# Altium PCB kernel.PcbDoc (part 5 of 7)
Units mil, origin at the board's own origin, x right, y up, seen from the top; angles counter-clockwise.
Board outline 2360 x 2450.34 mil, 6 copper layers (Top Layer, GND, SIGNAL, POWER, GND1, Bottom Layer), stack 32.112 mil thick; 150 components, 174 nets, 684 pads, 710 vias.
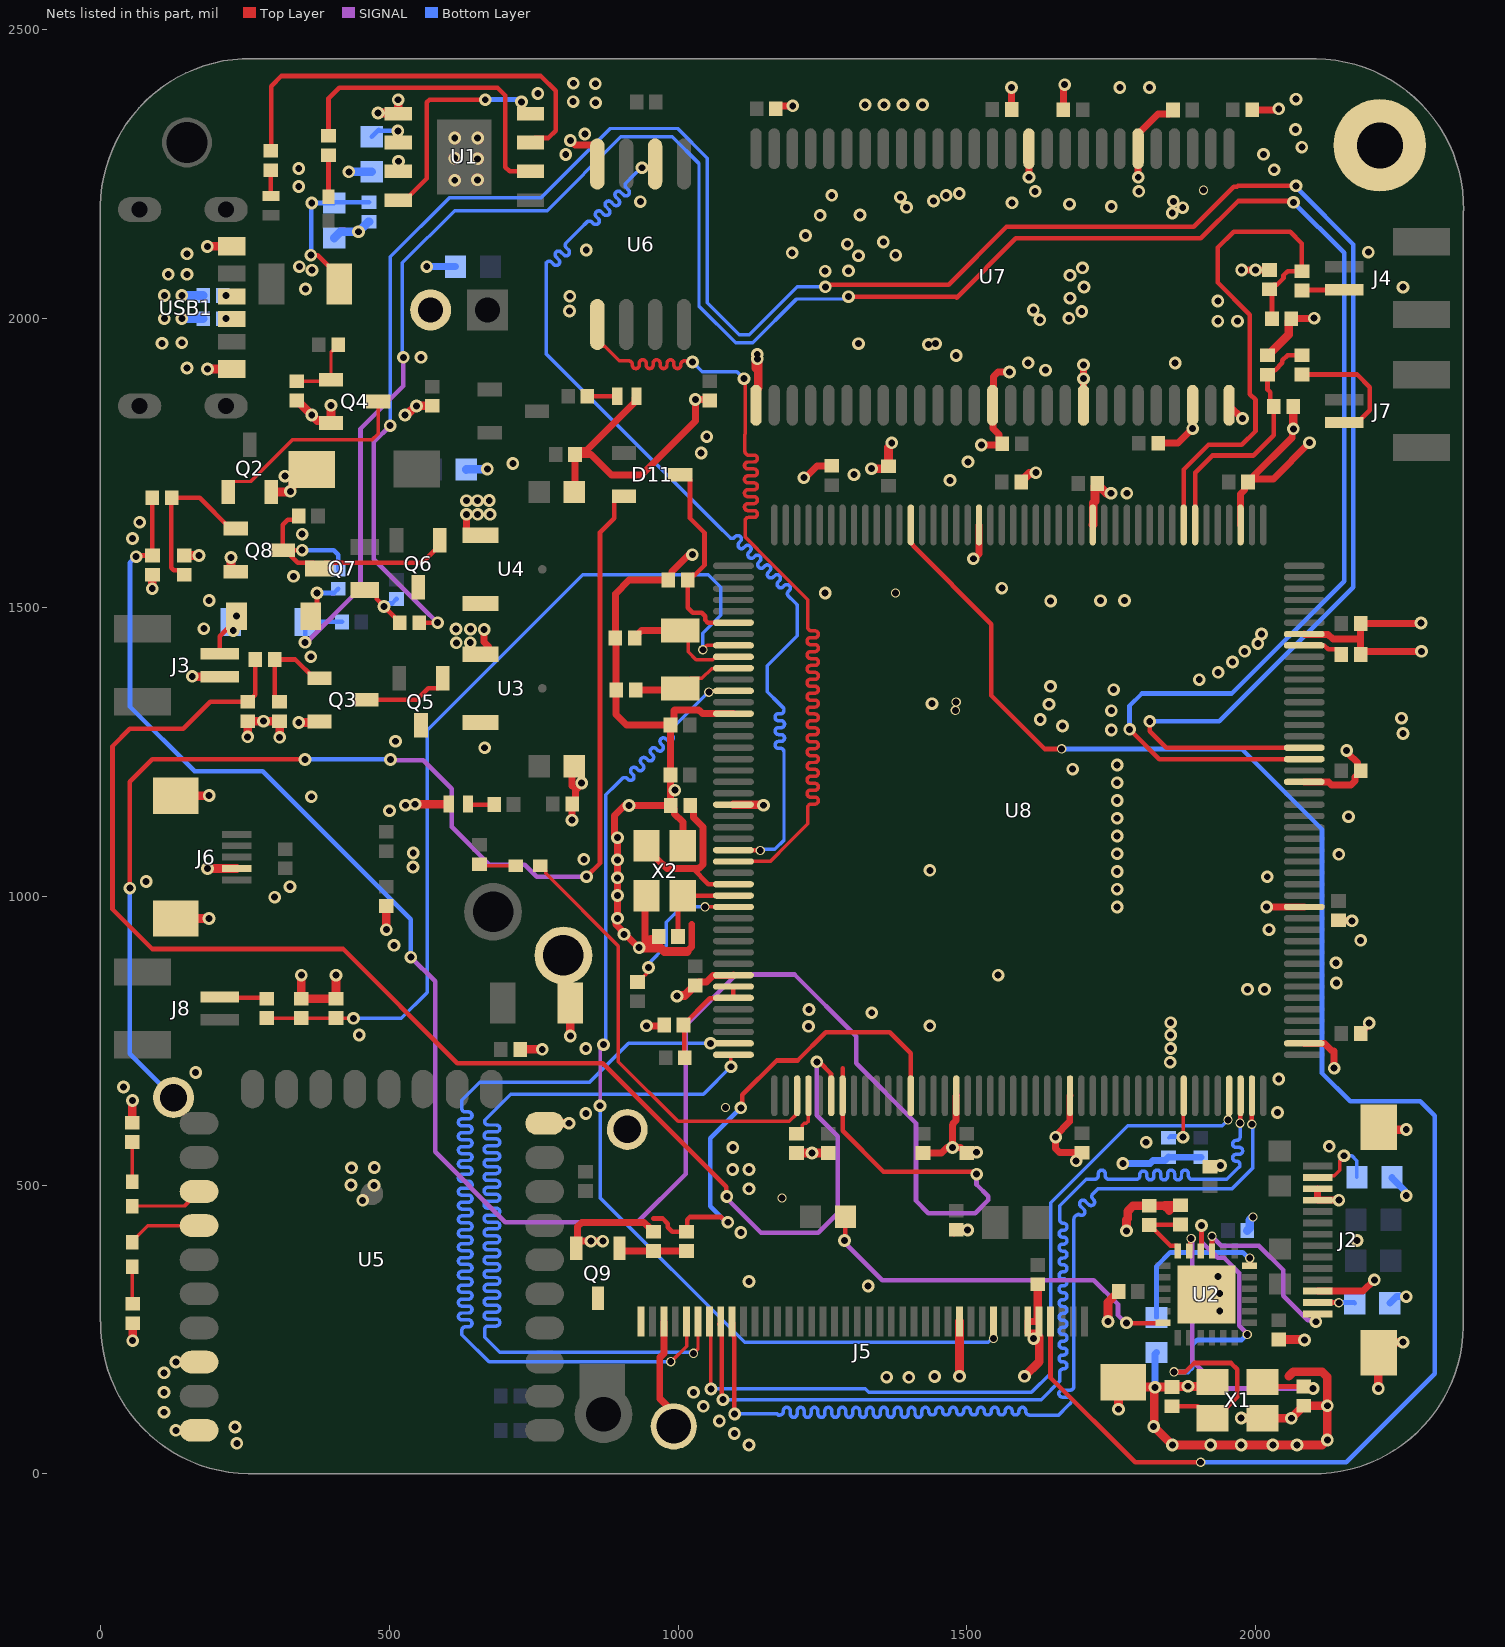
[diagram p8: the nets of this part, all layers, seen from the top]

## Via types
v1: diameter 22, hole 12, Top Layer to Bottom Layer, tented both sides, 583 vias
v2: diameter 16, hole 12, Top Layer to Bottom Layer, tented both sides, 111 vias
v3: diameter 23.62, hole 15.75, Top Layer to Bottom Layer, 8 vias
v4: diameter 28, hole 14, Top Layer to Bottom Layer, 5 vias
v5: diameter 22, hole 12, Top Layer to Bottom Layer, 3 vias

## Nets (pads, with @x,y where several pads share a name; then routed paths per layer and width w, separated by ;. In a path a pad name is that pad's centre, name@x,y a point inside that pad or via, vN(x,y) a via of type N, cw(c..) or ccw(c..) an arc to the next point about the centre after c; other vN are vias at no path point) (continued)
GND: B1.1 C1.1 C2.1 C4.2 C5.2 C6.1 C7.2 C8.1 C9.2 C10.2 C11.2 C12.1 C13.1 C14.1 C15.1 C16.1 C17.2 C18.2 C19.2 C20.1 C21.1 C22.1 C23.1 C24.1 C25.2 C26.2 C27.1 C28.1 C29.2 C30.1 C31.1 C32.1 C33.1 C34.1 C35.1 C36.1 C37.1 C38.1 C39.1 C40.1 C41.1 C42.1 C43.1 C44.1 C45.2 C46.1 C47.1 C48.1 C49.1 C50.1 C51.1 C52.1 C53.1 C54.2 D1.1 D2.1 J1.2 J2.3 J2.11 J2.12 J2.15 J2.16 J3.2 J5.3 J5.29 J5.35 J5.36 J5.42 J6.4 J6.6 J6.7 pad.3 pad.4 Q3.2 Q4.2 Q8.2 Q9.2 R1.2 R4.1 R10.1 R11.2 R12.2 R13.1 R19.2 R20.1 R21.1 R22.1 R32.1 R33.1 R34.1 R35.2 R37.2 R39.2 R41.2 R46.2 R48.2 R50.2 R51.2 R53.1 R54.2 U1.1 U1.3 U2.25 U3.1 U4.1 U5.10 U5.26 U5.28 U6.4 U7.6 U7.12 U7.28 U7.41 U7.46 U7.52 U7.54 U8.14 U8.22 U8.37 U8.61 U8.71 U8.90 U8.102 U8.113 U8.126 U8.135 U8.148 U8.158 USB1.A12 USB1.B12 X1.2 X1.4 X2.2 X2.4 | length 9541.5
  Top Layer w10: C36.1@1500,555.63 1501.23,556.86 v1(1516.78,556.86) 1517.08,556.86 v1@1518.32,555.63 ; v1@1690.85,536.89 1691.66,537.7 1691.66,549.38 C33.1@1698.47,556.2
  Top Layer w12: v1(633.96,1661.3) 633.96,1634.74 643.76,1624.95 U4.1@658.21,1624.95 ; U3.1@658.21,1419.05 671.76,1432.6 664.39,1439.98 v1(664.39,1461.74) ; v1(813.66,2308.47) 821.72,2300.4 854.38,2300.4 860.3,2294.49 U6.4@860.3,2267.76 ; v1(816.33,1131.77) 816.53,1131.97 816.53,1159.8 822.54,1165.81 822.54,1182.86 833.18,1193.5 v1(833.18,1196.2) ; 816.73,1190.71 816.73,1221.42 C7.2@820.32,1225 ; C10.2@820.32,1700 821.73,1701.42 C11.2@821.73,1765 848.97,1765 885,1728.97 936.52,1728.97 1030,1822.46 v1(1030,1860) 1052.18,1860 1054.46,1857.72 C17.2@1055,1858.27 ; Q9.2@823.82,390.88 823.82,398.62 Q9.2@826.34,401.13 ; C11.2@827.54,1771.63 841.17,1771.63 925.25,1855.71 925.25,1862.84 D2.1@928.11,1865.7 ; v1(869.76,403.01) 828.38,403.01 828.29,403.09 Q9.2@826.34,401.13 ; v1@889.73,1101.42 889.73,1139.73 907.31,1157.31 v1(915.13,1157.31) C25.2@987.6,1157.31 ; v1@889.96,1032.61 890.63,1033.28 891.84,1033.28 895.12,1036.56 v1(895.12,1063.1) ; v1@890.63,1002.56 891.84,1002.56 895.12,1005.84 v1(895.12,1031.94) ; v1@890.63,1064 891.4,1064 895.12,1067.72 v1(895.12,1101.42) ; v1@892.54,959.94 892.54,950.88 906.55,936.87 v1(906.55,934.17) 908.72,934.17 927.89,915 927.89,913.27 v1@930.57,910.59 ; v1(895.12,961.85) v1(895.12,1001.22) ; v1@942.8,914.78 942.8,998.42 X2.2@945.29,1000.91 ; v1(945.29,775.72) 974.73,775.72 C53.1@975.97,776.97 ; R41.2@957.3,419.42 956.32,419.42 950.51,425.23 950.51,426.22 941.45,435.27 833.37,435.27 826.34,428.24 Q9.2@826.34,401.13 ; J5.3@975.52,263.94 975.52,208.78 968.39,201.66 968.39,130.4 992.7,106.09 pad.3@992.7,82.27 ; v1(994.5,1183.69) v1@987.24,1183.69 ; X2.4@1008.29,1087.53 1008.29,1128.51 993.41,1143.39 993.41,1151.5 C25.2@987.6,1157.31 ; 1015.49,904.3 1015.49,904.51 1023.81,912.83 1023.81,950.95 ; v1(1024.79,1591.39) 1019.19,1591.39 989.08,1561.29 989.08,1553.17 C29.2@983.27,1547.36 915.2,1547.36 891.54,1523.7 C27.1@891.54,1447.36 892.4,1446.5 892.4,1315.03 910.92,1296.5 C31.1@986.89,1296.5 ; C30.1@1030,845.63 1035.81,851.44 1048.92,851.44 1060.43,862.95 1095.42,862.95 U8.37@1095.91,863.43 ; U8.14@1095.91,1316.18 1042.25,1316.18 1035.84,1322.6 993.92,1322.6 992.7,1321.38 992.7,1302.31 C31.1@986.89,1296.5 ; C48.1@1169.48,2363.2 1175,2368.72 1175.22,2368.49 v1(1198.59,2368.49) ; v1(1217.8,1724.77) 1220.6,1724.77 1240.9,1745.07 C39.1@1266.09,1745.07 ; R51.2@1423.89,555.63 1456.17,555.63 1465.54,565 v1(1475,565) ; U8.61@1481.73,654.77 1481.24,654.28 1481.24,611.91 1476.1,606.78 1476.1,604.98 1475,603.87 v1(1475,565) ; C36.1@1500,555.63 1499.02,555.63 1489.36,565.28 1482.23,565.28 1480.19,567.33 1477.86,565 v1(1475,565) ; v1@1512.95,1584.34 1521.1,1592.49 U8.158@1521.1,1642.95 ; v1(1525.16,1781.14) 1559.11,1781.14 C51.1@1561.42,1783.46 1555.61,1789.27 1555.61,1799.65 1545.34,1809.92 1545.34,1849.11 U7.41@1544.45,1850 1545.92,1851.47 1545.92,1899.47 1554.14,1907.68 v1(1574,1907.68) ; C46.1@1577.43,2361.87 v1(1577.43,2400) ; v1(1607.44,2244.76) U7.12@1607.44,2294.26 ; J5.36@1622.7,263.94 J5.35@1605.43,263.94 1605.43,244.45 1605.53,244.35 1618.43,244.35 v1@1625.11,237.67 ; C50.1@1667.04,2361.73 1667.04,2396.59 1667.45,2397 1667.45,2403.09 v1(1669.37,2405) ; U8.71@1678.58,654.77 1678.09,654.28 1678.09,609.87 1653.3,585.08 1653.3,563.23 1660.33,556.2 C33.1@1698.47,556.2 ; U7.46@1701.93,1850 v1(1701.93,1920) ; v1(1796.69,2244.76) 1796.42,2245.03 U7.6@1796.42,2294.26 1796.42,2319.85 1831.01,2354.44 1850.97,2354.44 1856.78,2360.25 C49.1@1856.78,2361.24 ; C52.1@1831.3,1784.42 1865.76,1784.42 v1(1890.91,1809.57) U7.52@1890.91,1850 ; C15.1@1921.02,531.86 1922.16,532.99 1937.82,532.99 v1(1938.95,534.12) ; U7.54@1953.9,1850 1976.75,1827.15 v1(1977.25,1827.15) ; U8.135@1973.86,1642.95 1973.86,1696.38 1980.92,1703.44 1980.92,1711.55 C43.1@1986.73,1717.36 1986.73,1718.35 1992.54,1724.16 1992.93,1724.16 2063.31,1794.54 2063.31,1807.79 v1@2065.03,1809.52 ; v1(1975.73,2084.11) C22.1@2023.85,2084.11 ; C43.1@1991.87,1722.5 2030.55,1722.5 v1(2093.3,1785.25) ; C47.1@1993.85,2361.54 2038.34,2361.54 v1(2040,2363.2) ; v1(2019.09,981.54) U8.102@2084.09,981.54 ; R39.2@2061.73,2000 2100.31,2000 v1(2101.2,2000.89) ; U8.90@2084.09,745.32 2119.09,745.32 2131.52,732.89 ; U8.113@2084.09,1198.07 2084.58,1197.59 2126.47,1197.59 2131.49,1192.57 2165.05,1192.57 2172.08,1199.6 2172.08,1206.72 2181.73,1216.38 C41.1@2181.73,1217.36 2175.92,1223.17 2175.92,1231.29 v1@2160.6,1246.6 ; U8.126@2084.09,1453.98 2084.58,1453.49 2125.56,1453.49 2133.59,1445.46 2181.73,1445.46 ; J2.3@2107.24,316.42 2185.75,316.42 v1(2205.43,336.1) ; J2.12@2107.24,493.58 J2.11@2107.24,473.9 v1(2143.96,473.9) ; v1(2135.9,702.52) 2135.9,731.94 ; C38.1@2143.18,958.27 2166.16,958.27 v1(2166.86,957.56) ; v1(2157.52,1252.41) 2157.52,1249.71 v1@2160.6,1246.63 ; C37.1@2181.73,762.36 2181.73,763.35 2194.48,776.09 2194.48,781.16 2196.03,781.16 v1(2196.39,780.79) ; v1(2286.93,1424.02) 2187.2,1424.02 C54.2@2181.73,1418.56 2181.73,1445.46 ; v1@2286.93,1473.66 2285.63,1472.36 C44.1@2181.73,1472.36 2181.73,1445.46 ; C31.1@986.89,1296.5 C35.1@986.89,1210.08 987.24,1209.72 v1@987.24,1183.69 ; v1@987.24,1183.69 987.24,1157.66 C25.2@987.6,1157.31
  Top Layer w15: R37.2@55.17,608.03 55.17,646 v1(55.71,646.54) ; v1(55.84,230.66) R35.2@55.84,260.92 ; v1(89.76,1532.53) 89.76,1555.91 R33.1@90.33,1556.48 ; v1(130.63,75.55) U5.28@170.79,75.55 ; v1(130.63,193.66) U5.26@170.79,193.66 ; J6.6@130.63,961.55 v1(187.94,961.55) v1@188.25,961.85 ; J6.7@130.63,1174.15 187.81,1174.15 v1(188.25,1174.58) ; R34.1@145.33,1589.94 145.47,1590.08 v1(170.79,1590.08) ; v1(159.02,1380.69) 159.76,1379.95 206.56,1379.95 J3.2@206.93,1380.32 ; v1@185.36,1048.27 v1(185.47,1048.16) J6.4@236.14,1048.16 ; v1(185.36,1912.71) USB1.A12@227.44,1912.71 ; v1@188.86,2125 v1(185.06,2125) 185.36,2125.3 USB1.B12@227.44,2125.3 ; v1(226.17,1586.59) 226.17,1566.18 230.49,1561.86 Q8.2@234.25,1561.86 ; v1(255,1276) R11.2@255,1303.27 v1(282.5,1303.27) R12.2@310,1303.27 310.32,1302.95 v1(310.32,1275.14) ; R20.1@340,1858.27 340.98,1858.27 v1(365.92,1833.33) 375.66,1823.59 394.94,1823.59 Q4.2@399.25,1819.28 v1(399.25,1850) ; v1(343.35,1300.94) 377.59,1300.94 Q3.2@379.25,1302.6 ; v1(347.9,863.43) C24.1@347.9,822.72 R48.2@407.9,822.72 v1(407.9,863.43) ; v1(480.75,2356.05) 514.34,2356.05 U1.1@515.5,2354.88 v1(515.5,2379) ; v1(495,942.17) R53.1@495,983.27 ; U1.3@515.5,2254.88 515.97,2255.35 v1(515.97,2272.54) ; v1(527.31,1833.33) 528.65,1834.67 531.18,1834.67 545.44,1848.93 v1(547.33,1848.93) R1.2@574.37,1848.93 ; v1(544.94,1159.38) 602.45,1159.38 D1.1@603.07,1160 ; C20.1@726.73,735 v1(764.99,735) ; U5.10@769.21,607.05 v1(811.38,607.05) v1@812.36,608.03 ; v1(813.66,757.99) C21.1@813.66,815 ; C26.2@966.54,930.59 966.54,929.61 962.22,925.3 953.31,925.3 942.8,914.78 939.95,911.93 931.91,911.93 930.57,910.59 969.88,910.59 976.18,904.3 1015.49,904.3 ; v1(998.25,827.05) 999.59,828.39 1011.77,828.39 1024.7,841.32 1025.69,841.32 C30.1@1030,845.63 ; U8.22@1095.91,1158.7 1146.75,1158.7 v1(1147.88,1157.57) ; U7.28@1135,1850 1135,1876.86 1138.71,1880.57 1138.71,1928.9 v1(1137.26,1930.36) ; 1135,1914.52 1135,1936.27 v1(1137.1,1938.36) ; R54.2@1210.3,551.32 1205.98,555.63 R54.2@1205,555.63 C34.1@1259.02,555.63 ; C34.1@1254.7,551.32 C34.1@1259.02,555.63 ; C34.1@1260,555.63 C34.1@1259.02,555.63 ; v1(1334.82,1740.39) 1335.34,1739.87 1359.96,1739.87 R50.2@1364.27,1744.18 1364.27,1777.46 1370,1783.19 v1(1370,1785.09) ; C1.1@1477.42,418.11 C1.1@1481.73,422.42 v1(1501.42,422.42) ; v1(1487.32,169) J5.29@1487.32,263.94 ; C40.1@1594.16,1717.36 1594.16,1718.35 1607.93,1732.12 1618.19,1732.12 v1(1619.53,1733.46) ; v1(1599.84,169) 1625.11,194.28 v1@1625.11,237.67 ; J5.36@1622.7,263.94 C2.1@1622.7,328.12 ; U8.148@1717.95,1642.95 1718.63,1643.63 1718.63,1680.75 1721.74,1683.86 1721.74,1710.09 C42.1@1726.05,1714.4 1726.05,1713.42 1742.8,1696.66 1748.32,1696.66 v1(1749.38,1697.72) ; v1(1744.29,263.86) 1744.29,297.3 C14.1@1762.67,315.68 ; v1(1762.67,111.96) 1762.67,133.17 1754.09,141.74 J5.42@1770.78,158.43 1778.72,150.5 C18.2@1855.17,150.5 1856.11,151.44 1917.53,151.44 X1.4@1925.5,159.41 ; v1(1776.36,420.76) 1776.36,439.48 1778.46,441.58 1778.46,454.87 1787.76,464.17 1810.46,464.17 1810.63,464.34 C12.1@1815.75,464.34 1815.92,464.17 1842.65,464.17 1850.64,456.18 1851.49,457.02 ; v1(1823.48,82.27) 1824.54,83.34 1824.54,148.78 v1(1825.6,149.85) ; v1@1825.6,80.15 v1(1855.75,50) v1(1922.16,50) v1(1974.91,50) v1(2029.65,50) v1(2071.46,50) 2115.27,50 v1(2124.06,58.79) v1(2124.06,117.98) ; 1842.81,464.76 1869.45,464.76 C13.1@1869.87,465.18 ; v1(1974.8,96.82) 2011.72,96.82 X1.2@2012.12,96.42 v1(2061.83,96.42) 2078.09,112.68 2078.09,113.67 2082.4,117.98 C19.2@2083.38,117.98 v1(2124.06,117.98) ; C23.1@2020.48,1936.46 2021.46,1936.46 2057.42,1972.42 2057.42,1995.69 R39.2@2061.73,2000 ; C16.1@2040.08,232.67 2078.21,232.67 2079.11,231.77 v1(2084.57,231.77) ; 2057.15,169 2064.9,176.75 2115.01,176.75 2124.06,167.71 v1(2124.06,117.98) ; R46.2@2064.85,1847.78 2065.03,1847.6 v1@2065.03,1809.52 ; v1(2212.34,148) 2212.34,209.78 2230.76,228.2 v1(2255,228.2) ; J2.15@2212.76,599.8 2216.45,596.11 v1(2260.68,596.11)
  Bottom Layer w12: v1(565,2090) C6.1@614.68,2090 ; v1@1771.97,537.37 1817.45,537.37 1822.57,542.48 1843.37,542.48 C45.2@1849.18,548.29 C32.1@1905,548.27 ; v1(1825.6,149.85) 1825.6,207.51 R21.1@1828.29,210.2 ; R22.1@2232.24,295.57 2243.66,306.99 v1(2260.68,306.99) ; R32.1@2235.95,513.47 2235.95,512.49 2258.77,489.66 2258.77,483.67 v1(2260.68,481.76)
  Bottom Layer w15: v1(140.98,2000) R13.1@178.27,2000 ; v1(140.98,2040) R10.1@178.27,2040 ; C4.2@405,2139.69 415.81,2150.49 v1(446.67,2150.49) 464.02,2167.83 C5.2@465,2167.83 ; v1@430,2254.1 v1(430.15,2254.25) R4.1@470,2254.25 ; C8.1@633.38,1738.97 633.75,1739.34 669.53,1739.34 v1(669.9,1739.71) ; R19.2@1985.54,421.25 1989.85,425.56 1989.85,439.45 v2@1995,444.6
  other v1: 1122.95,50 236.14,53.06 1097.4,70 232.89,81.23 1071.6,91.76 110,106.83 1043.83,117.04 110,141.28 1026.81,141.28 1882.97,151.82 1399.61,167.28 1361.13,167.58 1444.28,168.54 110,175 1615.72,234.22 1937.82,282.39 1937.82,312 1329.13,325.23 1122.95,333.04 1934.49,341.95 849.07,403.01 2175.32,403.94 1108.72,417.88 454,473.59 1122.95,493.63 433.99,500.37 473.75,499.55 1094.59,526.98 1122.95,526.98 434.8,529.85 474.29,530.39 1770.06,537.37 1689.17,542.03 1232.01,555.63 1094.95,565.28 2127.42,567.17 1810.46,574.15 1653.71,583.1 840.43,624.01 2037.82,625.76 40,670 2039.97,683.79 165,695 1851.99,712.74 840.43,736.54 1852.75,736.54 448.18,759.97 1852.75,759.97 1225.97,774.87 1435.92,775.72 1852.75,781.16 1335.34,798.33 1226.68,803.98 1985.97,838.95 2015.31,838.95 2139.68,850.04 1554.14,863.43 2139.23,884.74 932.74,911.1 508.31,915 2181.73,923.8 2022.9,942.17 1760.24,981.54 301.73,998.42 1760.24,1012.25 328.32,1016.63 79.26,1025.74 2020.04,1033.85 1760.24,1042.96 1435.92,1045 541.16,1050.86 836.89,1064 2143.99,1072.68 1760.24,1073.67 541.59,1075 1760.24,1104.38 1760.24,1135.09 2160.83,1137.87 500.67,1148.09 528.32,1157.57 1760.24,1165.8 365.18,1172.36 1760.24,1196.51 1683.12,1220.02 1760.24,1227.22 665.22,1257.13 510.92,1268.36 2255,1281.83 1750.12,1288.02 1665.5,1294.86 1627.08,1305.93 2252.55,1308.4 1750.12,1321.38 1642.3,1332.44 1439.78,1333.39 1754.16,1357.79 1644.91,1363.38 1902.38,1375 1935,1387.62 1959.97,1405.62 364.37,1414.7 1980.92,1424.02 2003.81,1437.7 616.23,1438.86 640.31,1439.12 2010,1453.98 179.1,1463.34 615.57,1462.67 640.58,1462.54 2286.28,1473.01 1645.11,1511.19 188.25,1511.9 1731.42,1511.89 1773.08,1512.02 1254.7,1525 1560.64,1533.35 334.26,1553.92 1511.29,1584.34 55.71,1619.28 349.32,1627.01 67.99,1647.58 653.21,1661.3 674.59,1661.3 633.92,1685 652.71,1684.93 673.22,1685.34 1777.01,1697.72 1470.81,1720.05 1304.57,1730 713.98,1749.11 1502.03,1752.08 1040.02,1767.4 1049.76,1795.66 2065.22,1809.33 1701.93,1896.04 1636.29,1910.81 150,1914.52 1606.19,1923.42 1860.67,1923.14 555.08,1933.01 1481.46,1936.14 1433.53,1955.12 106.6,1957.17 1312.6,1956.67 1445.87,1956.67 140.98,1958.27 1934.49,1995.69 1968.6,1995.69 1626.45,1997.92 110.69,2000 1676.52,2000.47 1698.97,2012.38 812.2,2013.38 1615.17,2015 1934.49,2030.5 1678.73,2035.44 812.73,2038.76 110.69,2040 355.18,2051.27 2255,2054.47 1702.73,2054.97 1678.58,2074.91 117.52,2076.75 150,2076.71 1254.7,2082.25 1295,2082.86 366.46,2083.86 1999.79,2084.11 1700.39,2088.02 344.43,2090 1312.6,2108.86 1376.67,2110 150,2112.25 1197.61,2113.86 2195,2115.15 841.17,2118.86 1293.05,2128.86 1355.47,2132.63 1220.6,2143.86 1246.07,2178.86 1315,2179.32 1855.53,2182.81 1873.8,2192.23 1395.39,2192.68 1750.12,2194.3 1677.64,2198.14 1578.03,2200.58 934.8,2202.54 1857.45,2203 1442.36,2203.67 1385.28,2210.3 1266.09,2213.39 1464.14,2213.57 1486.9,2216.62 1618.19,2220.36 1797.84,2220.36 343.35,2228.83 613.44,2239.63 652.71,2240.22 2031.95,2257.8 343.43,2260.05 652.71,2276.73 613.44,2277.92 805.59,2284.02 2013.59,2284.53 2080,2296.86 613.44,2312.73 653.21,2312.73 838.61,2319.82 2069.05,2327.6 1323.98,2370.22 1356.63,2370.22 1389.5,2370.22 1423.18,2370.22 857.49,2373.72 818.46,2375.64 2070,2380 757.27,2389.91 1764.92,2400 1816.38,2400 856.93,2406.68 818.8,2407.51
  other v2: 1995.33,444.57 1180.05,477.51 1082.05,634.38 1480,1321.99 1481.46,1336.17 1376.42,1525.25 1909.75,2222.47
HSYNC: J5.32 U8.12 | length 1895.3
  Top Layer w6: v2@1054.02,1354.63 1054.48,1355.09 1095.45,1355.09 U8.12@1095.91,1355.55
  SIGNAL w6: v1(865,637.44) 865,737.27 v1(870.93,743.19)
  Bottom Layer w6: v1(865,637.44) 865,478.24 1115.29,227.95 1537.17,227.95 1542.85,233.63 v2@1547.18,233.63 ; v1@865,736.41 865,737.29 875.12,747.41 875.12,1175.74 892.69,1193.31 903.3,1203.92 cw(c907.54,1199.67) 911.79,1203.92 913.51,1202.19 ccw(c917.76,1206.43) 922,1202.19 ccw(c917.76,1206.43) 922,1210.67 919.57,1213.11 cw(c923.81,1217.35) 928.05,1221.59 930.48,1219.16 ccw(c934.73,1223.4) 938.97,1219.16 ccw(c934.73,1223.4) 938.97,1227.64 936.54,1230.08 cw(c940.78,1234.32) 936.54,1238.56 cw(c940.78,1234.32) 945.02,1238.56 947.45,1236.13 ccw(c951.7,1240.37) 955.94,1236.13 ccw(c951.7,1240.37) 955.94,1244.62 953.51,1247.05 cw(c957.75,1251.29) 953.51,1255.53 cw(c957.75,1251.29) 961.99,1255.53 964.43,1253.1 ccw(c968.67,1257.34) 972.91,1261.59 970.48,1264.02 cw(c974.72,1268.26) 970.48,1272.5 cw(c974.72,1268.26) 978.96,1272.51 981.4,1270.07 ccw(c985.64,1274.31) 989.88,1270.07 ccw(c985.64,1274.31) 989.88,1278.56 988.15,1280.28 cw(c992.4,1284.53) 988.15,1288.77 1001.23,1301.85 v2@1054.02,1354.63
  other v2: 1546.21,234.81 1053.27,1353.32
KEY0: C22.2 R38.2 R39.1 U8.140 | length 929.5
  Top Layer w8: U8.140@1875.43,1642.95 1875.43,1738.81 1918.4,1781.78 1976.05,1781.78 1999.79,1805.52 1999.79,1859.69 1990,1869.47 1990,2007.01 1934.49,2062.52 1934.49,2123.22 1961.76,2150.49 2059.59,2150.49 2080,2130.08 R38.2@2080,2082.25 ; R39.1@2028.27,2000 2028.27,2046.23 C22.2@2023.85,2050.65 2031.66,2058.46 2036.94,2058.46 2048.12,2069.63 2048.12,2074.91 2055.45,2082.25 R38.2@2079.02,2082.25
KEY1: C23.2 R44.2 R46.1 U8.139 | length 438.5
  Top Layer w8: U8.139@1895.12,1642.95 1895.12,1733.58 1924.53,1762.99 1996.11,1762.99 2031.38,1798.26 R46.1@2031.38,1847.78 ; R46.1@2031.38,1848.26 2025.33,1854.31 2025.33,1872.58 2020.48,1877.43 C23.2@2020.48,1902.99 2028.29,1910.81 2033.57,1910.81 2046.31,1923.54 2046.31,1927.84 2055.2,1936.73 R44.2@2080,1936.73
KEY2: C24.2 R47.2 R48.1 U8.8 | length 1556
  Top Layer w6: R47.2@288.1,789.25 C24.2@347.9,789.25 R48.1@407.9,789.25 437.76,789.25 v1(438.34,788.67) ; v2(1043,1426.84) 1043,1427.14 1050.15,1434.29 U8.8@1095.91,1434.29
  Bottom Layer w6: v1(438.34,788.67) 520.78,788.67 565.59,833.49 565.59,1287.24 834.71,1556.36 1052.3,1556.36 1073.78,1534.87 1073.78,1486.73 1042.53,1455.48 1042.53,1444.55 1042.7,1444.38 1042.7,1427.14 v2(1043,1426.84)
LCD_RST: J5.37 U8.164 | length 3002.6
  Top Layer w8: U8.164@1402.99,1642.95 1402.99,1612.21 1407.17,1608.04 1407.17,1606.61 1542.55,1471.22 1542.55,1347.54 1635.11,1254.99 v2@1664.49,1254.99 ; J5.37@1644.8,263.94 1644.8,166.74 1791.55,20 v2@1905,20
  Bottom Layer w8: v2@1664.49,1254.99 1975.77,1254.99 2114.9,1115.86 2114.9,693.83 2163.73,645 2285,645 2310,620 2310,173.39 2156.61,20 v2@1905,20
  other v2: 1904.75,20.25 1664.23,1255.24
LED: D10.1 U8.47 | length 784.8
  Top Layer w6: D10.1@761.21,1052.7 763.11,1052.7 770.74,1045.07 770.74,1039.96 896.78,913.92 896.78,713.79 999.97,610.59 1141.09,610.59 1141.35,610.34 1192.47,610.34 1206.14,624.01 U8.47@1206.14,654.77
LEDK: R40.2 U8.57 | length 851.1
  Top Layer w8: 957.22,442.13 973.34,442.13 982.17,433.3 982.17,427.35 990.1,419.42 1015.88,419.42 1015.88,440.06 1020.56,444.75 1075.04,444.75 1083.36,436.43 1085.42,436.43 v1(1086.19,435.66) ; v1(1108.72,633.86) 1111.44,636.58 1111.44,656.14 1171.02,715.73 1206.89,715.73 1255.59,764.42 1366.81,764.42 1402.99,728.25 U8.57@1402.99,654.77
  Bottom Layer w8: v1(1086.19,435.66) 1083.18,435.66 1055.66,463.19 1055.66,580.8 v1(1108.72,633.86)
LINK: J2.1 U2.3 | length 309
  Top Layer w8: U2.3@1924.36,386.01 v2(1924.36,411.5) ; v1@2104.97,263.98 2104.97,274.51 2104.33,275.14 2106.24,277.05 J2.1@2107.24,277.05
  SIGNAL w8: v2(1924.36,411.5) 1940.56,395.3 2005.67,395.3 2047.9,353.07 2047.9,308.22 2090.17,265.95 2101.92,265.95 v1@2104.97,262.9
  other v1: 2104.16,263.41
LINKA: 
LINKK: 
MISO: U6.2 U8.26 | length 1902.6
  Top Layer w6: v1(937.7,2261.29) 953.82,2261.29 U6.2@960.3,2267.76
  Top Layer w8: U8.26@1095.91,1079.96 v2@1141.35,1079.96
  Bottom Layer w6: v1(937.7,2261.29) 936.32,2261.29 921.93,2246.9 910.22,2235.19 ccw(c914.46,2230.94) 910.22,2226.7 914.13,2222.8 cw(c909.88,2218.55) 905.64,2214.31 901.03,2218.92 ccw(c896.79,2214.68) 892.54,2218.92 ccw(c896.79,2214.68) 892.54,2210.44 897.16,2205.83 cw(c892.91,2201.58) 897.16,2197.34 cw(c892.91,2201.58) 888.67,2197.34 884.06,2201.95 ccw(c879.82,2197.71) 875.57,2201.95 ccw(c879.82,2197.71) 875.57,2193.47 880.18,2188.86 cw(c875.94,2184.61) 880.18,2180.37 cw(c875.94,2184.61) 871.7,2180.37 867.09,2184.98 ccw(c862.85,2180.74) 858.6,2176.5 861.82,2173.28 cw(c857.58,2169.04) 861.82,2164.8 cw(c857.58,2169.04) 853.33,2164.8 850.82,2167.3 ccw(c846.58,2163.06) 842.34,2167.3 831.73,2156.7 825.39,2150.36 806.56,2131.53 ccw(c810.81,2127.29) 806.56,2123.04 810.39,2119.22 cw(c806.14,2114.98) 810.39,2110.74 cw(c806.14,2114.98) 801.9,2110.74 797.37,2115.27 ccw(c793.13,2111.02) 788.89,2115.27 ccw(c793.13,2111.02) 788.89,2106.78 793.42,2102.25 cw(c789.17,2098.01) 784.93,2093.77 781.11,2097.59 ccw(c776.87,2093.35) 772.62,2097.59 771.51,2096.48 771.51,2081.73 771.51,1939.21 1067.55,1643.17 1089.34,1621.38 ccw(c1093.59,1625.62) 1097.83,1621.38 1099.29,1622.84 cw(c1103.53,1618.59) 1107.78,1622.84 cw(c1103.53,1618.59) 1107.78,1614.35 1105.61,1612.18 ccw(c1109.85,1607.94) 1105.61,1603.7 ccw(c1109.85,1607.94) 1114.09,1603.7 1116.26,1605.87 cw(c1120.5,1601.62) 1124.75,1605.87 cw(c1120.5,1601.62) 1124.75,1597.38 1122.58,1595.21 ccw(c1126.82,1590.97) 1122.58,1586.73 ccw(c1126.82,1590.97) 1131.06,1586.73 1133.23,1588.9 cw(c1137.47,1584.65) 1141.72,1580.41 1139.55,1578.24 ccw(c1143.79,1574) 1139.55,1569.76 ccw(c1143.79,1574) 1148.03,1569.76 1150.2,1571.93 cw(c1154.44,1567.68) 1158.69,1571.93 cw(c1154.44,1567.68) 1158.69,1563.44 1156.52,1561.27 ccw(c1160.76,1557.03) 1156.52,1552.79 ccw(c1160.76,1557.03) 1165.01,1552.79 1167.17,1554.95 cw(c1171.42,1550.71) 1175.66,1554.95 cw(c1171.42,1550.71) 1175.66,1546.47 1173.49,1544.3 ccw(c1177.73,1540.06) 1181.98,1535.82 1184.14,1537.98 cw(c1188.39,1533.74) 1192.63,1537.98 cw(c1188.39,1533.74) 1192.63,1529.5 1191.17,1528.04 ccw(c1195.41,1523.8) 1191.17,1519.55 1201.78,1508.95 1206.36,1504.36 1206.36,1450.99 1154.38,1399.01 1154.38,1354.13 1174.84,1333.68 1183.43,1325.09 1183.43,1322.05 cw(c1177.43,1322.05) 1177.43,1316.05 1173.91,1316.05 ccw(c1173.91,1310.05) 1173.91,1304.05 1178.43,1304.05 cw(c1178.43,1298.05) 1178.43,1292.05 1173.91,1292.05 ccw(c1173.91,1286.05) 1173.91,1280.05 1178.43,1280.05 cw(c1178.43,1274.05) 1178.43,1268.05 1173.91,1268.05 ccw(c1173.91,1262.05) 1173.91,1256.05 1177.43,1256.05 cw(c1177.43,1250.05) 1183.43,1250.05 1183.43,1247.05 1183.43,1097.24 1167.3,1081.11 1142.5,1081.11 v2@1141.35,1079.96
  other v2: 1142.38,1079.47
MOSI: U6.5 U8.27 | length 1900.4
  Top Layer w6: U6.5@860.3,1989.8 860.3,1963 871.01,1952.29 872.94,1952.29 898.38,1926.85 914.91,1926.85 cw(c914.91,1920.85) 920.91,1920.85 920.91,1919.55 ccw(c926.91,1919.55) 932.91,1919.55 932.91,1922.85 cw(c938.91,1922.85) 944.91,1922.85 944.91,1919.55 ccw(c950.91,1919.55) 956.91,1919.55 956.91,1922.85 cw(c962.91,1922.85) 968.91,1922.85 968.91,1919.55 ccw(c974.91,1919.55) 980.91,1919.55 980.91,1922.85 cw(c986.91,1922.85) 992.91,1922.85 992.91,1919.55 ccw(c998.91,1919.55) 1004.91,1919.55 1004.91,1920.85 cw(c1010.91,1920.85) 1010.91,1926.85 1013.22,1926.85 1013.91,1926.15 1015.07,1925 v1(1025,1925) ; U8.27@1095.91,1060.28 1159.35,1060.28 1190.74,1091.67 1224.71,1125.64 1224.71,1139.9 ; v1(1114.21,1896.04) 1116.16,1894.1 1116.16,1824.61 1116.17,1800.76 ; 1115.89,1799.47 1115.89,1796.47 1115.91,1769.82 ccw(c1121.91,1769.83) 1121.91,1763.83 1131.37,1763.83 cw(c1131.37,1757.83) 1131.37,1751.83 1120.93,1751.83 ccw(c1120.93,1745.83) 1120.93,1739.83 1131.38,1739.83 cw(c1131.38,1733.83) 1131.38,1727.83 1120.95,1727.83 ccw(c1120.95,1721.83) 1120.95,1715.83 1131.4,1715.83 cw(c1131.4,1709.83) 1131.4,1703.83 1120.97,1703.83 ccw(c1120.97,1697.83) 1120.97,1691.83 1131.42,1691.83 cw(c1131.42,1685.83) 1131.42,1679.83 1120.98,1679.83 ccw(c1120.98,1673.83) 1120.98,1667.83 1131.44,1667.83 cw(c1131.44,1661.83) 1131.44,1655.83 1122,1655.83 ccw(c1122,1649.83) 1116,1649.82 1116.01,1637.83 1116.01,1634.83 ; 1116.29,1636.11 1116.3,1621.94 1160.54,1577.7 1224.71,1513.54 1224.71,1477.08 ; 1224.42,1138.62 1224.42,1153.62 cw(c1230.42,1153.62) 1230.42,1159.62 1236.95,1159.62 ccw(c1236.95,1165.62) 1236.95,1171.62 1229.42,1171.62 cw(c1229.42,1177.62) 1229.42,1183.62 1236.95,1183.62 ccw(c1236.95,1189.62) 1236.95,1195.62 1229.42,1195.62 cw(c1229.42,1201.62) 1229.42,1207.62 1236.95,1207.62 ccw(c1236.95,1213.62) 1236.95,1219.62 1229.42,1219.62 cw(c1229.42,1225.62) 1229.42,1231.62 1236.95,1231.62 ccw(c1236.95,1237.62) 1236.95,1243.62 1229.42,1243.62 cw(c1229.42,1249.62) 1229.42,1255.62 1236.95,1255.62 ccw(c1236.95,1261.62) 1236.95,1267.62 1229.42,1267.62 cw(c1229.42,1273.62) 1229.42,1279.62 1236.95,1279.62 ccw(c1236.95,1285.62) 1236.95,1291.62 1229.42,1291.62 cw(c1229.42,1297.62) 1229.42,1303.62 1236.95,1303.62 ccw(c1236.95,1309.62) 1236.95,1315.62 1229.42,1315.62 cw(c1229.42,1321.62) 1229.42,1327.62 1236.95,1327.62 ccw(c1236.95,1333.62) 1236.95,1339.62 1229.42,1339.62 cw(c1229.42,1345.62) 1229.42,1351.62 1236.95,1351.62 ccw(c1236.95,1357.62) 1236.95,1363.62 1229.42,1363.62 cw(c1229.42,1369.62) 1229.42,1375.62 1236.95,1375.62 ccw(c1236.95,1381.62) 1236.95,1387.62 1229.42,1387.62 cw(c1229.42,1393.62) 1229.42,1399.62 1236.95,1399.62 ccw(c1236.95,1405.62) 1236.95,1411.62 1229.42,1411.62 cw(c1229.42,1417.62) 1229.42,1423.62 1236.95,1423.62 ccw(c1236.95,1429.62) 1236.95,1435.62 1229.42,1435.62 cw(c1229.42,1441.62) 1229.42,1447.62 1236.95,1447.62 ccw(c1236.95,1453.62) 1236.95,1459.62 1230.42,1459.62 cw(c1230.42,1465.62) 1224.42,1465.62 1224.42,1475.79
  Bottom Layer w6: v1(1025,1925) 1041.78,1908.22 1102.04,1908.22 v1(1114.21,1896.04)
NetB1_2: B1.2 D11.2 | length 2203.5
  Top Layer w8: v1(51.04,1014.05) 51.04,1198.25 89.76,1236.98 v1(354.37,1236.98) ; v1(841.46,1034.07) 865,1057.61 865,1630.04 889.31,1654.35 889.31,1684.79 897.12,1692.6 D11.2@906.38,1692.6
  SIGNAL w8: v1@496.3,1235.35 558.9,1235.35 608.27,1185.97 608.27,1120.06 673.66,1054.67 734.75,1054.67 755.36,1034.07 v1(841.46,1034.07)
  Bottom Layer w8: v1(51.04,1014.05) 51.04,727.13 B1.2@126.73,651.44 ; v1(354.37,1236.98) 501.94,1236.98 v1(502.24,1236.68)
NetC4_1: C4.1 C5.1 R18.2 U1.4 U1.8 | length 663.8
  Top Layer w8: v1(364.37,2110) 376.54,2110 413.66,2072.87 R18.2@413.66,2059.69 ; U1.4@515.5,2204.88 527.31,2204.88 565,2242.57 565,2374.31 569.69,2379 v1(666.24,2379) ; v1@728.49,2375 728.49,2362.69 736.31,2354.88 U1.8@744.5,2354.88
  Bottom Layer w8: v1(364.37,2110) 365.15,2110.77 365.15,2199.54 v1(365.92,2200.31) C4.1@405,2200.31 405.98,2201.3 C5.1@465,2201.3 ; v1@666.62,2379.38 723.79,2379.38 727.79,2375.38 v1(728.88,2375.38)
NetC12_2: C12.2 C13.2 U2.6 | length 127
  Top Layer w8: U2.6@1865.31,386.01 1865.31,393.58 1863.8,395.1 1852.52,395.1 1816.74,430.87 C12.2@1815.75,430.87 1816.17,431.29 1869.45,431.29 C13.2@1869.87,431.71
NetC18_1: C18.1 U2.4 X1.1 | length 751.3
  Top Layer w8: C18.1@1855.17,117.04 1899.97,117.04 1920.58,96.42 X1.1@1925.5,96.42 1944.14,115.06 1949.8,115.06 1967.96,133.21 1967.96,181.3 1957.2,192.05 1893.8,192.05 1878.27,176.52 v2@1858.82,176.52 ; U2.4@1904.68,386.01 1906.19,387.52 1906.19,426.35 v1@1905.98,426.57
  SIGNAL w8: v1(1906.27,429.98) 1906.27,402 1934.08,374.18 1945.13,374.18 1971.55,347.77 1971.55,256.41 v2@1986.11,241.85
  Bottom Layer w8: v2@1858.82,176.52 1882.92,176.52 1890.04,183.65 1890.04,223.37 1898.61,231.94 1976.2,231.94 v2@1986.11,241.85
  other v2: 1858.56,176.78 1985.39,241.28
NetC19_1: C19.1 U2.5 X1.3 | length 562.6
  Top Layer w8: U2.5@1884.99,386.01 1886.5,387.52 1886.5,405.78 1890.19,409.47 v2@1890.19,410.55 ; X1.3@2012.12,159.41 2020.09,151.44 C19.1@2083.38,151.44 2085.1,149.72 2097.84,149.72 v1(2099.56,148)
  SIGNAL w8: v2@1890.19,410.55 1890.19,196.2 1938.39,148 v1(2099.56,148)
  other v2: 1888.35,407.62
NetC29_1: C29.1 D11.3 U8.6 | length 361.6
  Top Layer w8: D11.3@1003.62,1730 1012.88,1730 1020.69,1722.19 1020.69,1654.58 1045.79,1629.48 1045.79,1573.03 1028.92,1556.16 1024.54,1556.16 1016.73,1548.35 1016.73,1499.8 1025.66,1490.87 1041.23,1490.87 1047.08,1485.01 1047.08,1478.35 1051.77,1473.66 U8.6@1095.91,1473.66
NetC45_1: C45.1 U8.81 | length 121.4
  Top Layer w6: v1@1875.02,585.08 1875.02,654.37 U8.81@1875.43,654.77
  Bottom Layer w6: C45.1@1849.18,581.76 C45.1@1850.53,583.1 ; v1@1874.04,585.08 1852.51,585.08 C45.1@1850.53,583.1 ; v1@1875.02,585.08 1873.05,583.1 C45.1@1850.53,583.1
  other v1: 1874.04,583.1
NetC53_2: C53.2 L2.2 U8.38 U8.39 | length 183.9
  Top Layer w8: L2.2@1011.93,720.34 1010.68,721.59 1010.68,775.72 C53.2@1009.44,776.97 1009.44,777.95 1054.97,823.48 1095.33,823.48 U8.39@1095.91,824.06 U8.38@1095.91,843.74
NetC54_1: C54.1 U8.125 | length 71.3
  Top Layer w8: U8.125@2084.09,1434.29 2084.67,1433.71 2119.11,1433.71 2125.47,1427.35 2140.46,1427.35 2148.27,1419.54 C54.1@2148.27,1418.56
NetC100_2: 
NetC101_2: 
NetC102_2: 
NetD1_2: D1.2 R2.2 | length 45.6
  Top Layer w8: D1.2@636.53,1160 637.83,1158.7 R2.2@681.61,1158.7
NetD2_2: D2.2 R3.2 | length 51.5
  Top Layer w8: R3.2@843.12,1865.7 D2.2@894.64,1865.7
NetD3_1: D3.1 R5.2 | length 44.6
  Top Layer w8: D3.1@295,2212.37 R5.2@295,2257
NetD4_1: D4.1 Q2.2 | length 89.5
  Top Layer w15: Q2.2@295.96,1700 324.35,1700 333.14,1708.79 333.14,1714.58 357.53,1738.97 D4.1@365.92,1738.97
  other v1: 328.79,1701 319.43,1727.38
NetD5_1: D5.1 R8.2 | length 72
  Top Layer w8: D5.1@395,2211.13 R8.2@395,2283.15
NetD6_1: D6.1 D7.1 J3.1 | length 77.2
  Top Layer w8: J3.1@206.93,1419.68 206.93,1450.2 235.63,1478.9 v1(235.63,1485)
  other v1: 229.97,1460.2
NetD6_2: D6.2 R29.2 | length 84.1
  Top Layer w8: D6.2@364.37,1485 375,1495.63 v1(375,1525)
  Bottom Layer w8: v1(375,1525) 404.46,1525 R29.2@411.73,1532.27
NetD8_1: D8.1 R35.1 | length 64.8
  Top Layer w6: D8.1@55,358.81 55,295.22 R35.1@55.84,294.38
NetD8_2: D8.2 U5.22 | length 128.8
  Top Layer w6: D8.2@55,401.19 55,403.09 81.79,429.88 U5.22@170.79,429.88
NetD9_1: D9.1 R37.1 | length 68.4
  Top Layer w6: D9.1@55,506.19 55,574.39 R37.1@55.17,574.56
NetD9_2: D9.2 U5.21 | length 126.2
  Top Layer w6: D9.2@55,463.81 145.66,463.81 U5.21@170.79,488.94
NetD10_2: D10.2 R49.2 | length 63.6
  Top Layer w6: R49.2@656.44,1055.65 659.39,1052.7 D10.2@718.83,1052.7
NetJ2_2: J2.2 R22.2 | length 65.3
  Top Layer w8: J2.2@2107.3,296.73 2143.6,296.73 v2(2143.96,296.37)
  Bottom Layer w8: v2@2143.6,296.73 2170.45,296.73 R22.2@2171.61,295.57
NetJ2_13: J2.13 R32.2 | length 126.4
  Top Layer w6: J2.13@2107.24,513.27 2110.15,516.18 2136.09,516.18 2145.81,525.89 2145.81,540.85 2145.7,540.95 2145.7,541.81 2153.07,549.18 v1(2153.07,550.8)
  Bottom Layer w6: v1(2153.07,550.8) 2166.73,550.8 2175.32,542.22 R32.2@2175.32,513.47
NetJ4_1: J4.1 R38.1 | length 73.7
  Top Layer w8: R38.1@2080,2048.78 2080.77,2049.55 2152.3,2049.55 J4.1@2153.07,2050.31
NetJ5_1: J5.1 Q9.3 | length 19.7
  Top Layer w6: J5.1@936.14,263.94 J5.1@936.14,283.63
NetJ7_1: J7.1 R44.1 | length 219.9
  Top Layer w8: R44.1@2080,1903.27 2175.66,1903.27 2197.5,1881.43 2197.5,1841.12 2176.69,1820.31 J7.1@2153.07,1820.31
NetJ8_1: J8.1 R47.1 | length 98.8
  Top Layer w8: J8.1@190.5,825.67 191.97,824.19 286.62,824.19 R47.1@288.1,822.72
NetQ2_1: Q2.1 Q4.3 | length 362.7
  Top Layer w6: Q2.1@221.16,1700 221.16,1709.25 229.97,1718.06 260.11,1718.06 332.05,1790 470,1790 480.75,1800.75 Q4.3@480.75,1856.68
NetQ3_1: Q3.1 R12.1 R16.2 | length 168
  Top Layer w8: R12.1@310,1336.73 309.54,1336.73 301.73,1344.54 R16.2@301.73,1410 337.4,1410 370,1377.4 Q3.1@379.25,1377.4
NetQ3_3: Q3.3 Q5.1 | length 152.6
  Top Layer w8: Q3.3@460.75,1340 547.27,1340 567.65,1360.37 584.59,1360.37 592.4,1368.18 Q5.1@592.4,1377.44
NetQ4_1: Q4.1 R15.2 R20.2 | length 126.3
  Top Layer w6: R20.2@340,1891.73 396.9,1891.73 Q4.1@399.25,1894.08 399.25,1941.53 411.73,1954.02 R15.2@411.73,1955
NetQ5_3: Q5.3 U3.3 | length 7.1
  Top Layer w8: U3.3@653.21,1295.94 U3.3@658.21,1300.94
NetQ6_1: Q6.1 Q7.3 Q8.3 R25.1 R29.1 | length 509
  Top Layer w8: R25.1@343.35,1658.47 336.61,1651.72 324.52,1651.72 315.75,1642.95 Q8.3@315.75,1599.27 Q8.3@320.51,1599.27 ; v1(349.32,1599.27) Q8.3@320.51,1599.27 ; Q6.1@587.4,1616.65 587.4,1607.4 557.13,1577.12 388.6,1577.12 Q7.3@378.95,1567.48 369.17,1577.26 341.63,1577.26 328.32,1590.57 328.32,1591.45 Q8.3@320.51,1599.27
  Bottom Layer w8: v1(349.32,1599.27) 403.86,1599.27 411.73,1591.39 R29.1@411.73,1565.74
NetQ6_3: Q6.3 U4.3 | length 17.8
  Top Layer w8: U4.3@640.43,1506.84 U4.3@658.21,1506.84
NetQ7_1: Q7.1 R24.1 R26.2 | length 116
  Top Layer w8: Q7.1@457.69,1530.08 468.52,1530.08 478.3,1520.3 478.3,1514.61 518.27,1474.65 R26.2@518.27,1473.66
  Bottom Layer w8: v1@489.6,1502.39 490.68,1502.39 495.23,1506.95 504.79,1506.95 R24.1@512.6,1514.76
  other v1: 491.08,1501.84
NetQ8_1: Q8.1 R31.2 R34.2 | length 282.3
  Top Layer w8: R34.2@145.33,1556.48 137.52,1564.29 127.22,1564.29 122.54,1568.97 122.54,1689.2 R31.2@123.34,1690 171.66,1690 225,1636.66 Q8.1@234.25,1636.66
NetQ9_1: Q9.1 R40.1 R41.1 | length 118.6
  Top Layer w12: Q9.1@898.62,390.88 898.62,390.43 903.09,385.96 R41.1@957.3,385.96 R40.1@1014.89,385.96
NetR4_2: R4.2 U1.2 | length 74.3
  Top Layer w8: v1(515,2325) 515,2313 519.31,2308.69 U1.2@515.5,2304.88
  Bottom Layer w8: R4.2@470,2314.88 482.09,2326.97 484.06,2325 v1(515,2325)
NetR5_1: R5.1 U1.7 | length 743.9
  Top Layer w8: R5.1@295,2290.46 295.67,2291.13 295.67,2402.33 313.33,2420 762.52,2420 788.27,2394.25 788.27,2325.33 775.63,2312.69 752.31,2312.69 U1.7@744.5,2304.88
NetR6_2: R6.2 U2.12 | length 665.6
  Top Layer w8: v1@1289.75,399.48 1289.75,444.75 R6.2@1290,445 ; v1@1774.72,260.68 1837.02,260.68 1838.73,262.39 U2.12@1839.42,261.7
  SIGNAL w8: v1@1289.75,399.48 1353.61,335.62 1719.89,335.62 1761.65,293.86 1761.65,274.66 1774.72,261.6 v1@1774.72,260.68
  other v1: 1776.36,261.57 1288.22,404.28
NetR8_1: R8.1 U1.6 | length 554.8
  Top Layer w8: R8.1@395,2316.61 395,2381.35 413.65,2400 687.43,2400 701.14,2386.29 701.14,2262.2 708.46,2254.88 U1.6@744.5,2254.88
NetR10_2: R10.2 USB1.A5
  other v5: 217.6,2040
NetR13_2: R13.2 USB1.B5
  other v5: 217.6,2000
NetR21_2: R21.2 U2.24 | length 276.9
  Top Layer w8: U2.24@1989.62,360.12 1990.34,360.84 v2@1990.34,370.69
  Bottom Layer w8: R21.2@1828.29,270.83 1828.29,359.72 1851.99,383.41 1977.61,383.41 v2@1990.33,370.69
  other v2: 1989.81,373.59
NetR54_1: R54.1 U8.48 | length 77.2
  Top Layer w6: R54.1@1205,589.1 1205.98,589.1 1214.8,597.91 1214.8,603.56 1218.31,607.08 1222.32,607.08 1225.83,610.59 U8.48@1225.83,654.77
NetR55_1: R55.1 U8.31 | length 249.9
  Top Layer w6: R55.1@930,851.73 930.98,851.73 952.45,873.2 v1@952.45,873.66 ; v2@1046.85,981.54 U8.31@1095.91,981.54
  Bottom Layer w6: v1(948.93,876.88) 948.93,883.45 979.89,914.41 979.89,955.21 1006.22,981.54 v2@1046.85,981.54
  other v2: 1046.59,981.8
OSC1: C25.1 U8.29 X2.1 | length 398.4
  Top Layer w8: X2.1@945.29,1082.61 973.27,1054.62 ; 979.61,1048.29 1025.25,1048.29 1052.62,1020.91 U8.29@1095.91,1020.91
  Top Layer w12: X2.1@945.29,1087.53 945.29,1082.61 972.9,1055 973.65,1055 980.68,1047.97 1025.25,1047.97 1035.89,1047.97 1042.92,1055 1042.92,1120.06 1026.87,1136.11 1026.87,1151.5 C25.1@1021.06,1157.31
OSC2: C26.1 U8.30 X2.3 | length 161.5
  Top Layer w8: C26.1@1000,930.59 1000,992.63 X2.3@1008.29,1000.91 1008.6,1001.22 U8.30@1095.91,1001.22
OSC32_IN: C27.2 U8.9 X3.1 | length 220.5
  Top Layer w6: X3.1@1017.89,1458.72 1017.89,1423.09 1031.14,1409.84 1059.96,1409.84 1064.74,1414.61 U8.9@1095.91,1414.61
  Top Layer w12: C27.2@925,1447.36 925,1448.35 936.85,1460.2 1016.41,1460.2 X3.1@1017.89,1458.72
OSC32_OUT: C28.2 U8.10 X3.2 | length 201.5
  Top Layer w6: X3.2@1003.62,1359.81 1020.97,1377.16 1041.13,1377.16 1058.13,1394.16 1083.59,1394.16 1084.99,1392.76 U8.10@1093.74,1392.76
  Top Layer w12: C28.2@926.73,1357.36 1003.62,1357.36 X3.2@1023.34,1357.36
POWER_DOWN: D7.2 R23.1 U8.115 | length 4375.7
  Top Layer w8: v1(1295,2038) 1480.52,2038 1482.33,2036.19 1585,2138.86 1905.23,2138.86 1970.04,2203.67 v1@2066.03,2203.67 ; v1@1781.63,1289.1 1833.29,1237.44 U8.115@2084.09,1237.44
  SIGNAL w8: v1(354.37,1439.67) 356.98,1439.67 450.35,1533.04 450.35,1809.61 524.21,1883.46 v1@524.21,1933.01
  Bottom Layer w6: v1@522.89,1934.59 522.89,2096.5 613.44,2187.05 773.34,2187.05 901.18,2314.88 989.92,2314.88 1036.29,2268.52 1036.29,2021.38 1099.73,1957.94 1129.09,1957.94 1205.15,2034 v1@1291,2034
  Bottom Layer w8: v1(354.37,1439.67) D7.2@354.37,1475 R23.1@418.27,1475 ; v1@522.89,1934.59 v1(524.47,1933.01) ; v1@1291,2034 v1(1295,2038) ; v1@1781.63,1289.1 1781.63,1329.54 1803.17,1351.08 1958.89,1351.08 2153.07,1545.26 2153.07,2113.78 v1(2065.4,2201.45)
  other v1: 1781.89,1289.1
POWER_M: R31.1 R33.2 U8.51 | length 3503
  Top Layer w8: v1(61.91,1588.03) 63.82,1589.94 R33.2@90.33,1589.94 89.87,1590.4 R31.1@89.87,1690 ; 1284.88,702.52 U8.51@1284.88,654.77 1284.88,594.16 1355.69,523.34 v1@1516.67,523.34
  SIGNAL w8: v1(537.52,894.68) 579.42,852.78 579.42,557.43 701.19,435.66 929.52,435.66 1013.09,519.22 1013.09,776.7 1101.05,864.66 1201.58,864.66 1308.25,757.99 1308.25,710.66 1411.93,606.98 1411.93,473.03 1433.51,451.44 1514.23,451.44 1537.02,474.24 1537.02,480.87 1516.77,501.12 v1@1516.77,523.66
  Bottom Layer w8: v1(61.91,1588.03) 51.18,1577.3 51.18,1328.62 163.02,1216.78 280.93,1216.78 537.52,960.19 v1(537.52,894.68)
  other v1: 1516.92,519.06
POWER_MM: R26.1 U8.116 | length 4265.9
  Top Layer w8: R26.1@551.73,1473.66 v1@583.6,1473.66 ; v1(1255,2055) 1259,2059 1301.3,2059 1468.57,2059 1568.62,2159.04 1892.58,2159.04 1961.9,2228.36 1967.73,2228.36 1969.37,2230 v1(2070,2230) ; v1@1816.4,1302.91 1816.4,1285.75 1845.02,1257.13 U8.116@2084.09,1257.13
  SIGNAL w8: v1(501.64,1814.68) 473.52,1786.56 473.52,1583.75 559.23,1498.04 v1@583.6,1473.66
  Bottom Layer w6: v1(501.64,1814.68) 501.64,2106.85 604.47,2209.67 763.4,2209.67 882.92,2329.19 999.57,2329.19 1050.85,2277.92 1050.85,2027.32 1106.23,1971.94 1123.29,1971.94 1206.35,2055 v1(1255,2055)
  Bottom Layer w8: v1@1816.4,1302.91 1936.93,1302.91 2169.01,1534.99 2169.01,2128.4 2071.97,2225.44 2070,2227.41 v1(2070,2230)
  other v1: 1816.67,1302.91 583.87,1473.66
POWER_P: R11.1 R16.1 U8.50 | length 2488.7
  Top Layer w8: R16.1@268.27,1410 268.27,1349.02 255.98,1336.73 R11.1@255,1336.73 189.98,1336.73 143.38,1290.13 51.04,1290.13 20.95,1260.04 20.95,977.64 89.87,908.72 420.17,908.72 617.9,711 869.66,711 1083.36,497.3 1083.36,481.53 v1(1084.49,480.4) ; v1@1240.09,713.5 1240.85,712.74 1245.11,712.74 1264.79,693.05 1264.79,655.18 U8.50@1265.2,654.77
  SIGNAL w8: v1(1084.49,480.4) 1084.49,476.84 1143.63,417.69 1242.46,417.69 1276.21,451.44 1276.21,584.89 1240.09,621.01 v1@1240.09,713.5
  other v1: 1240.35,713.5
R0: J5.5 U8.43 | length 1961.8
  Top Layer w6: v2(987.42,194.27) 987.81,194.27 1014.88,221.35 J5.5@1014.88,263.94 ; v1@1055.42,745.95 1055.98,745.39 1095.84,745.39 U8.43@1095.91,745.32
  Bottom Layer w6: v2(987.42,194.27) 987.04,193.89 672.75,193.89 630.03,236.61 625.77,240.87 625.77,248.61 cw(c631.77,248.61) 631.77,254.61 637.43,254.61 ccw(c637.43,260.61) 637.43,266.61 625.77,266.61 cw(c625.77,272.61) 625.77,278.61 637.43,278.61 ccw(c637.43,284.61) 637.43,290.61 625.77,290.61 cw(c625.77,296.61) 625.77,302.61 637.43,302.61 ccw(c637.43,308.61) 637.43,314.61 625.77,314.61 cw(c625.77,320.61) 625.77,326.61 637.43,326.61 ccw(c637.43,332.61) 637.43,338.61 625.77,338.61 cw(c625.77,344.61) 625.77,350.61 637.43,350.61 ccw(c637.43,356.61) 637.43,362.61 625.77,362.61 cw(c625.77,368.61) 625.77,374.61 637.43,374.61 ccw(c637.43,380.61) 637.43,386.61 625.77,386.61 cw(c625.77,392.61) 625.77,398.61 637.43,398.61 ccw(c637.43,404.61) 637.43,410.61 625.77,410.61 cw(c625.77,416.61) 625.77,422.61 637.43,422.61 ccw(c637.43,428.61) 637.43,434.61 625.77,434.61 cw(c625.77,440.61) 625.77,446.61 637.43,446.61 ccw(c637.43,452.61) 637.43,458.61 625.77,458.61 cw(c625.77,464.61) 625.77,470.61 637.43,470.61 ccw(c637.43,476.61) 637.43,482.61 625.77,482.61 cw(c625.77,488.61) 625.77,494.61 637.43,494.61 ccw(c637.43,500.61) 637.43,506.61 625.77,506.61 cw(c625.77,512.61) 625.77,518.61 637.43,518.61 ccw(c637.43,524.61) 637.43,530.61 625.77,530.61 cw(c625.77,536.61) 625.77,542.61 637.43,542.61 ccw(c637.43,548.61) 637.43,554.61 625.77,554.61 cw(c625.77,560.61) 625.77,566.61 637.43,566.61 ccw(c637.43,572.61) 637.43,578.61 625.77,578.61 cw(c625.77,584.61) 625.77,590.61 637.43,590.61 ccw(c637.43,596.61) 637.43,602.61 625.77,602.61 cw(c625.77,608.61) 625.77,614.61 637.43,614.61 ccw(c637.43,620.61) 637.43,626.61 631.77,626.61 cw(c631.77,632.61) 625.77,632.61 625.77,647.18 633.38,654.79 656.45,677.87 846.82,677.87 914.27,745.32 v1@1056.97,745.32
  other v1: 1056.24,745.39
R1: J5.6 U8.44 | length 1950.5
  Top Layer w6: v2(1026.81,208.81) 1034.57,216.56 J5.6@1034.57,263.94 ; v1(1091.61,704.89) 1091.61,721.34 U8.44@1095.91,725.63
  Bottom Layer w6: v2(1026.81,208.81) 1025.67,209.96 1021.42,209.96 1020.99,210.39 691.57,210.39 666.9,235.06 665.35,236.61 665.35,250.06 cw(c671.35,250.06) 671.35,256.06 685.44,256.06 ccw(c685.44,262.06) 685.44,268.06 670.35,268.06 cw(c670.35,274.06) 670.35,280.06 685.44,280.06 ccw(c685.44,286.06) 685.44,292.06 670.35,292.06 cw(c670.35,298.06) 670.35,304.06 685.44,304.06 ccw(c685.44,310.06) 685.44,316.06 670.35,316.06 cw(c670.35,322.06) 670.35,328.06 685.44,328.06 ccw(c685.44,334.06) 685.44,340.06 670.35,340.06 cw(c670.35,346.06) 670.35,352.06 685.44,352.06 ccw(c685.44,358.06) 685.44,364.06 670.35,364.06 cw(c670.35,370.06) 670.35,376.06 685.44,376.06 ccw(c685.44,382.06) 685.44,388.06 670.35,388.06 cw(c670.35,394.06) 670.35,400.06 685.44,400.06 ccw(c685.44,406.06) 685.44,412.06 670.35,412.06 cw(c670.35,418.06) 670.35,424.06 685.44,424.06 ccw(c685.44,430.06) 685.44,436.06 670.35,436.06 cw(c670.35,442.06) 670.35,448.06 685.44,448.06 ccw(c685.44,454.06) 685.44,460.06 670.35,460.06 cw(c670.35,466.06) 670.35,472.06 685.44,472.06 ccw(c685.44,478.06) 685.44,484.06 670.35,484.06 cw(c670.35,490.06) 670.35,496.06 685.44,496.06 ccw(c685.44,502.06) 685.44,508.06 670.35,508.06 cw(c670.35,514.06) 670.35,520.06 685.44,520.06 ccw(c685.44,526.06) 685.44,532.06 670.35,532.06 cw(c670.35,538.06) 670.35,544.06 685.44,544.06 ccw(c685.44,550.06) 685.44,556.06 670.35,556.06 cw(c670.35,562.06) 670.35,568.06 685.44,568.06 ccw(c685.44,574.06) 685.44,580.06 670.35,580.06 cw(c670.35,586.06) 670.35,592.06 685.44,592.06 ccw(c685.44,598.06) 685.44,604.06 671.35,604.06 cw(c671.35,610.06) 665.35,610.06 665.35,612.55 674.07,621.27 710.15,657.35 1044.08,657.35 v1(1091.61,704.89)
R2: J5.7 U8.85 | length 1426.5
  Top Layer w6: J5.7@1054.26,263.94 1056.97,261.22 v1(1056.97,147.13) ; v2@1950.91,611.48 1953.5,614.07 1953.5,654.1 U8.85@1954.17,654.77
  Bottom Layer w6: v1(1056.97,147.13) 1323.99,147.13 1329.84,141.28 1477.42,141.28 1501.42,141.28 1585.83,141.28 1611.93,141.28 1645.3,174.64 1645.3,469.57 1778.22,602.49 1832.58,602.49 1832.66,602.57 1942.01,602.57 v2@1950.91,611.48
  other v2: 1951.95,613.03
R3: J5.8 U8.86 | length 1835.8
  Top Layer w8: J5.8@1073.93,263.94 1075,262.88 1071.6,259.47 1075.97,255.1 1075.97,130.64 v1(1077.94,128.66) ; v2@1973.1,606.94 1973.1,654.01 U8.86@1973.86,654.77
  Bottom Layer w6: v1(1077.94,128.66) 1628.57,128.66 1660.75,160.84 1660.75,175.84 cw(c1666.75,175.84) 1666.75,181.84 1667.38,181.84 ccw(c1667.38,187.84) 1667.38,193.84 1665.75,193.84 cw(c1665.75,199.84) 1665.75,205.84 1667.38,205.84 ccw(c1667.38,211.84) 1667.38,217.84 1665.75,217.84 cw(c1665.75,223.84) 1665.75,229.84 1667.38,229.84 ccw(c1667.38,235.84) 1667.38,241.84 1665.75,241.84 cw(c1665.75,247.84) 1665.75,253.84 1667.38,253.84 ccw(c1667.38,259.84) 1667.38,265.84 1665.75,265.84 cw(c1665.75,271.84) 1665.75,277.84 1667.38,277.84 ccw(c1667.38,283.84) 1667.38,289.84 1665.75,289.84 cw(c1665.75,295.84) 1665.75,301.84 1667.38,301.84 ccw(c1667.38,307.84) 1667.38,313.84 1665.75,313.84 cw(c1665.75,319.84) 1665.75,325.84 1667.38,325.84 ccw(c1667.38,331.84) 1667.38,337.84 1665.75,337.84 cw(c1665.75,343.84) 1665.75,349.84 1667.38,349.84 ccw(c1667.38,355.84) 1667.38,361.84 1665.75,361.84 cw(c1665.75,367.84) 1665.75,373.84 1667.38,373.84 ccw(c1667.38,379.84) 1667.38,385.84 1665.75,385.84 cw(c1665.75,391.84) 1665.75,397.84 1667.38,397.84 ccw(c1667.38,403.84) 1667.38,409.84 1665.75,409.84 cw(c1665.75,415.84) 1665.75,421.84 1667.38,421.84 ccw(c1667.38,427.84) 1667.38,433.84 1666.75,433.84 cw(c1666.75,439.84) 1660.75,439.84 1660.75,464.17 1665.15,468.57 1706.64,510.06 1718.57,510.06 1721.57,510.06 ccw(c1721.57,516.06) 1727.57,516.06 1727.57,519.87 cw(c1733.57,519.87) 1739.57,519.87 1739.57,516.06 ccw(c1745.57,516.06) 1745.57,510.06 1793.57,510.06 ccw(c1793.57,516.06) 1799.57,516.06 1799.57,518.37 cw(c1805.57,518.37) 1811.57,518.37 1811.57,515.06 ccw(c1817.57,515.06) 1823.57,515.06 1823.57,519.87 cw(c1829.57,519.87) 1835.57,519.87 1835.57,515.06 ccw(c1841.57,515.06) 1847.57,515.06 1847.57,519.87 cw(c1853.57,519.87) 1859.57,519.87 1859.57,515.06 ccw(c1865.57,515.06) 1871.57,515.06 1871.57,519.87 cw(c1877.57,519.87) 1883.57,519.87 1883.57,516.06 ccw(c1889.57,516.06) 1889.57,510.06 1899.47,510.06 1949.99,510.06 1966.26,526.34 1972.9,532.98 1972.9,535.34 ccw(c1966.9,535.34) 1966.9,541.34 1966.17,541.34 cw(c1966.17,547.34) 1966.17,553.34 1971.41,553.34 ccw(c1971.41,559.34) 1971.41,565.34 1966.17,565.34 cw(c1966.17,571.34) 1966.17,577.34 1967.1,577.34 ccw(c1967.1,583.34) 1973.1,583.34 1973.1,606.88 v2@1973.1,606.94
  other v2: 1972.84,607.19
R4: J5.9 U8.87 | length 2002.3
  Top Layer w8: J5.9@1093.62,263.94 1095.53,262.04 1095.53,239.53 1097.4,237.67 1097.4,106.83 1100.39,103.84 v1(1098.09,103.84) ; v2@1993.54,605.1 U8.87@1993.54,654.77
  Bottom Layer w6: v1(1098.09,103.84) 1098.14,103.89 1130.4,103.89 1130.45,103.84 1171.38,103.84 1173.24,101.98 1176.24,101.98 ccw(c1176.24,107.98) 1182.24,107.98 1182.24,109.24 cw(c1188.24,109.24) 1194.24,109.24 1194.24,104 ccw(c1200.24,104) 1206.24,104 1206.24,109.24 cw(c1212.24,109.24) 1218.24,109.24 1218.24,104 ccw(c1224.24,104) 1230.24,104 1230.24,109.24 cw(c1236.24,109.24) 1242.24,109.24 1242.24,104 ccw(c1248.24,104) 1254.24,104 1254.24,109.24 cw(c1260.24,109.24) 1266.24,109.24 1266.24,104 ccw(c1272.24,104) 1278.24,104 1278.24,109.24 cw(c1284.24,109.24) 1290.24,109.24 1290.24,104 ccw(c1296.24,104) 1302.24,104 1302.24,109.24 cw(c1308.24,109.24) 1314.24,109.24 1314.24,104 ccw(c1320.24,104) 1326.24,104 1326.24,109.24 cw(c1332.24,109.24) 1338.24,109.24 1338.24,104 ccw(c1344.24,104) 1350.24,104 1350.24,109.24 cw(c1356.24,109.24) 1362.24,109.24 1362.24,104 ccw(c1368.24,104) 1374.24,104 1374.24,109.24 cw(c1380.24,109.24) 1386.24,109.24 1386.24,104 ccw(c1392.24,104) 1398.24,104 1398.24,109.24 cw(c1404.24,109.24) 1410.24,109.24 1410.24,104 ccw(c1416.24,104) 1422.24,104 1422.24,109.24 cw(c1428.24,109.24) 1434.24,109.24 1434.24,107.98 ccw(c1440.24,107.98) 1446.24,107.98 1446.24,109.24 cw(c1452.24,109.24) 1458.24,109.24 1458.24,107.98 ccw(c1464.24,107.98) 1470.24,107.98 1470.24,109.24 cw(c1476.24,109.24) 1482.24,109.24 1482.24,107.98 ccw(c1488.24,107.98) 1494.24,107.98 1494.24,109.24 cw(c1500.24,109.24) 1506.24,109.24 1506.24,107.98 ccw(c1512.24,107.98) 1518.24,107.98 1518.24,109.24 cw(c1524.24,109.24) 1530.24,109.24 1530.24,107.98 ccw(c1536.24,107.98) 1542.24,107.98 1542.24,109.24 cw(c1548.24,109.24) 1554.24,109.24 1554.24,107.98 ccw(c1560.24,107.98) 1566.24,107.98 1566.24,109.24 cw(c1572.24,109.24) 1578.24,109.24 1578.24,107.98 ccw(c1584.24,107.98) 1590.24,107.98 1590.24,109.24 cw(c1596.24,109.24) 1602.24,109.24 1602.24,107.98 ccw(c1608.24,107.98) 1608.24,101.98 1618.88,101.98 1658.79,101.98 1674.91,118.1 1679.67,122.86 ccw(c1675.42,127.1) 1675.42,133.1 1665.15,133.1 cw(c1665.15,139.1) 1665.15,145.1 1679,145.1 ccw(c1679,151.1) 1685,151.1 1685,173.39 1685,432.85 1685,437.09 1685,441.33 cw(c1695.02,439.2) 1693.1,449.26 1693.89,449.41 ccw(c1698.17,453.62) 1702.41,457.86 1696.81,463.47 cw(c1701.05,467.71) 1696.81,471.95 cw(c1701.05,467.71) 1705.29,471.95 1710.89,466.35 ccw(c1715.14,470.59) 1719.38,466.35 ccw(c1715.14,470.59) 1719.38,474.84 1718.02,476.2 cw(c1722.26,480.44) 1718.02,484.68 1726.66,493.33 1737.89,493.33 1958.75,493.33 1994.59,529.16 v2@1994.59,599.58
  Bottom Layer w8: v2@1993.54,605.1 1994.31,604.33 1994.31,599.87 v2@1994.59,599.58
  other v2: 1993.29,605.35